# EAGLE board all (EAGLE 6.6.0), part 1 of 2
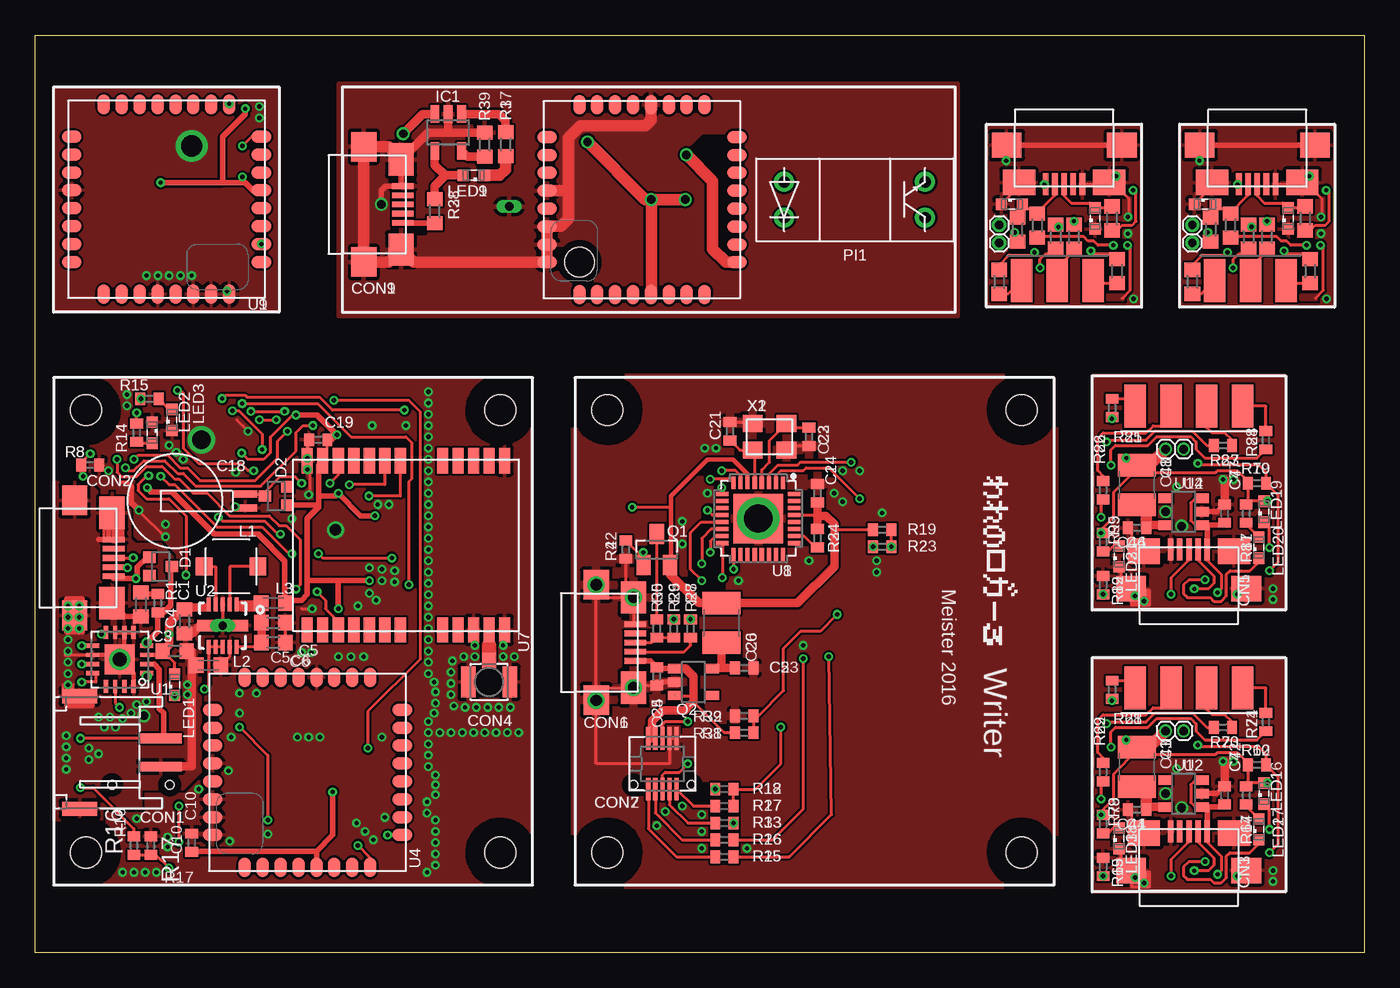
[diagram p0: board, top side]
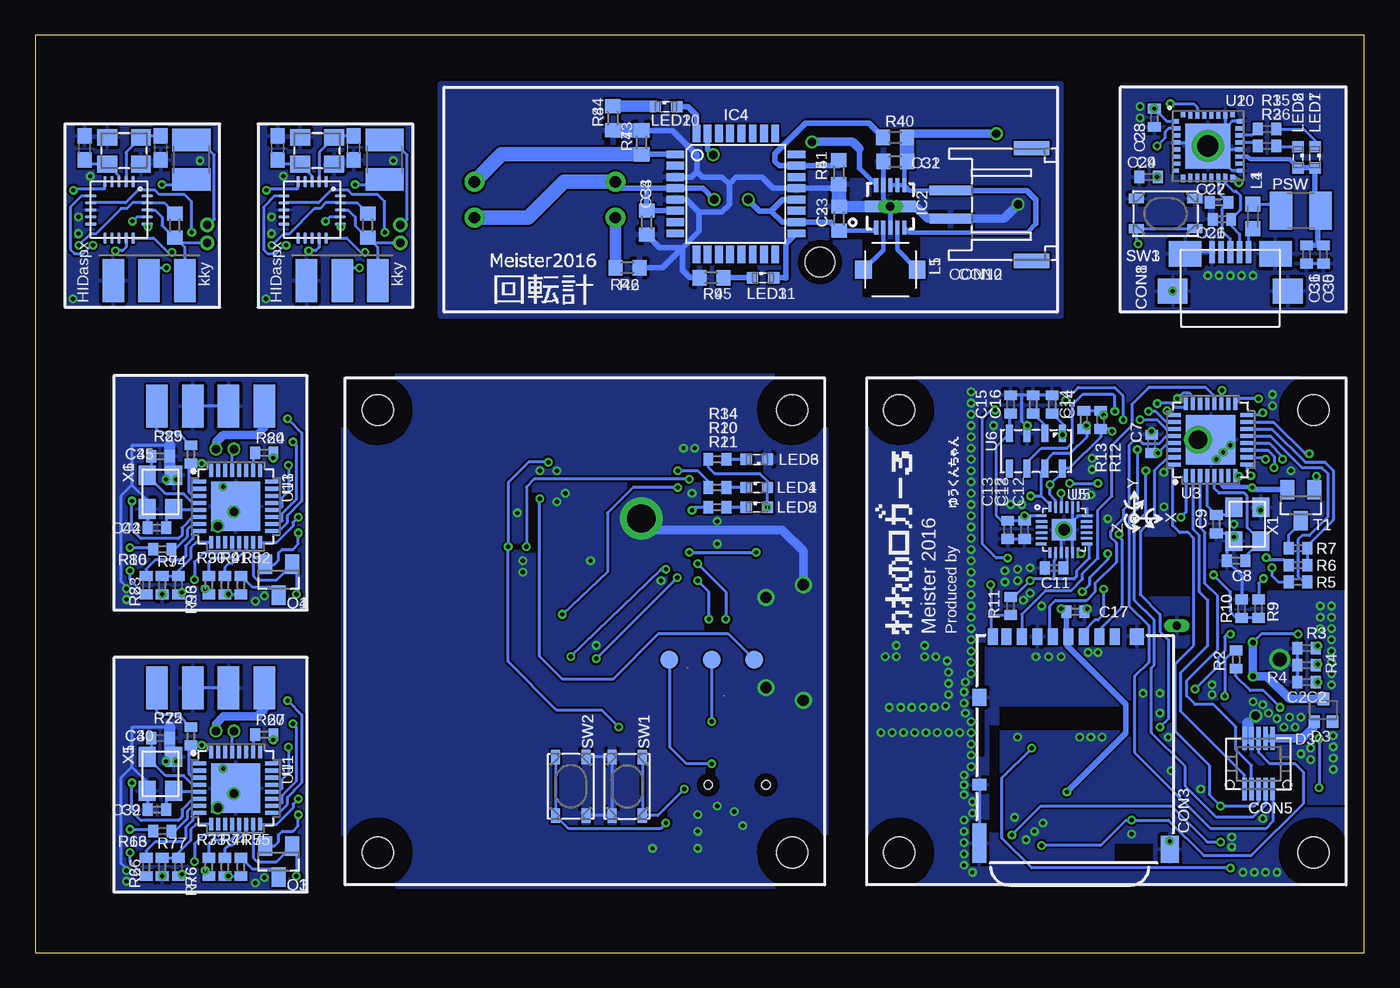
[diagram p1: board, bottom side, seen from below]

Size 94.3 x 65.1 mm. Coordinates in mm from the lower left corner, seen from the top.
Outline: 0,65.1 94.3,65.1 94.3,0 0,0 0,65.1
Copper layers (1*16): Top 0.035mm / dielectric 1.6mm / Bottom 0.035mm
Design rules "Elecrow_2-layer_PCB_eagle_rule": minimum track width 6mil, minimum drill 12mil, track to track 6mil, track to pad 6mil, pad to pad 6mil, via to via 8mil, smd to smd 0mil, copper to edge 20mil, drill to drill 10mil, minimum pad ring 6mil, minimum via ring 6mil, stop-mask expansion 0mil, vias tented up to drill 100mil, thermal gap 10mil
Holes 2.2 mm at 3.6,7.1 33,7.1 3.6,38.5 33,38.5 40.6,7.1 70,7.1 70,38.5 40.6,38.5
Holes 2.1 mm at 38.61,49.01
tRestrict: area 1.3,4.8 to 5.9,9.4; area 30.7,4.8 to 35.3,9.4; area 1.3,36.2 to 5.9,40.8; area 30.7,36.2 to 35.3,40.8; area 12.5,25.4 to 15.7,29.4; area 38.3,4.8 to 42.9,9.4; area 67.7,4.8 to 72.3,9.4; area 67.7,36.2 to 72.3,40.8; area 38.3,36.2 to 42.9,40.8; area 46.2,49 to 49.9,57.9; area 30.7,56.8 to 33.9,57.9; area 26.7,51.1 to 27.7,51.6; 1 more areas
bRestrict: area 1.3,4.8 to 5.9,9.4; area 30.7,4.8 to 35.3,9.4; area 12.5,25.4 to 15.7,29.4; area 1.3,36.2 to 5.9,40.8; area 30.7,36.2 to 35.3,40.8; area 38.3,4.8 to 42.9,9.4; area 67.7,4.8 to 72.3,9.4; area 67.7,36.2 to 72.3,40.8; area 38.3,36.2 to 42.9,40.8; area 31.7,46.7 to 35.5,50.5; area 43.2,48.3 to 45.1,48.9; area 34.6,55.7 to 40,58.6; 6 more areas

## Footprints (pad centres in the part's own frame; a part is rotated, then mirrored left to right if it is on the bottom)
0603 = smd 1 x 1.1: 1 -0.85,0; 2 0.85,0
0402 = smd 0.7 x 0.9: 1 -0.65,0; 2 0.65,0
DCK-3R3E224-E = smd 0.5 x 1.7: 1 -0.5,0; 2 0.5,0
C3225 = smd 1.6 x 2.7: 1 -1.4,0; 2 1.4,0
C0402 = smd 0.7 x 0.9: 1 -0.65,0; 2 0.65,0
C0603 = smd 1.1 x 1: 1 -0.85,0; 2 0.85,0
MICRO-B = smd 0.4 x 1.55: 1 1.3,2.775; 2 0.65,2.775; 3 0,2.775; 4 -0.65,2.775; 5 -1.3,2.775 | smd 2.3 x 1.8: CASE@1 -3.2,2.65; CASE@2 3.2,2.65 | smd 2.1 x 1.8: CASE@3 -4.1,0; CASE@4 4.075,0
2X4SMD = smd 1.524 x 3.048 bottom: 1 -3.81,0; 3 -1.27,0; 5 1.27,0; 7 3.81,0 | smd 1.524 x 3.048: 2 -3.81,0; 4 -1.27,0; 6 1.27,0; 8 3.81,0
JST-PH2 = smd 0.7 x 3: 1 1,-3.7; 2 -1,-3.7 | smd 1 x 2.5: PAD1 4,2.05; PAD2 -4,2.05
DM3AT-SF-PEJM5 = smd 0.7 x 1.2: 1 3.2,7.62; 2 2.1,7.62; 3 1,7.62; 4 -0.1,7.62; 5 -1.2,7.62; 6 -2.3,7.62; 7 -3.4,7.62; 8 -4.5,7.62; 9 -5.45,7.62 | smd 1 x 0.8: 10 -6.4,-2.88 | smd 1 x 1.2: P$10 4.75,7.62; P$12 -6.4,3.32 | smd 1.3 x 1.9: P$11 7.1,-7.48 | smd 1 x 2.8: P$14 -6.4,-7.03
U.FL-R-SMT-1 = smd 1.05 x 2.2: 1 -1.475,0; 2 1.475,0 | smd 1 x 1.05: 3 0,-1.525
DF12A-10DS = smd 0.3 x 1.6: 1 -1,-1.8; 2 -1,1.8; 3 -0.5,-1.8; 4 -0.5,1.8; 5 0,-1.8; 6 0,1.8; 7 0.5,-1.8; 8 0.5,1.8; 9 1,-1.8; 10 1,1.8 | hole 0.6: 2.05,1.5; -2.05,1.5
DF12D-10DP = smd 0.3 x 1.6 bottom: 1 -1,-1.8; 2 -1,1.8; 3 -0.5,-1.8; 4 -0.5,1.8; 5 0,-1.8; 6 0,1.8; 7 0.5,-1.8; 8 0.5,1.8; 9 1,-1.8; 10 1,1.8 | hole 0.6: 2.05,1.5; -2.05,1.5
UMD3 = smd 0.8 x 0.9: 1 0.65,-0.8; 2 -0.65,-0.8; 3 0,0.8
TSOT23-5 = smd 0.62 x 1.22: 1 -0.95,-1.31; 2 0,-1.31; 3 0.95,-1.31; 4 0.95,1.31; 5 -0.95,1.31
S-PVSON-N10 = smd 0.3 x 1: 1 -1,-1.5; 2 -0.5,-1.5; 3 0,-1.5; 4 0.5,-1.5; 5 1,-1.5; 6 1,1.5; 7 0.5,1.5; 8 0,1.5; 9 -0.5,1.5; 10 -1,1.5 | smd 3.6 x 0.8: PAD 0,0 | drill 0.6 long: PAD@1 0,0
LITE = smd 1.4 x 0.9: 1 0.25,11.43; 2 0.25,10.16; 3 0.25,8.89; 4 0.25,7.62; 5 0.25,6.35; 6 0.25,5.08; 7 0.25,3.81; 8 0.25,2.54; 17 13.72,2.54; 18 13.72,3.81; 19 13.72,5.08; 20 13.72,6.35; 21 13.72,7.62; 22 13.72,8.89; 23 13.72,10.16; 24 13.72,11.43 | smd 0.9 x 1.4: 9 2.54,0.25; 10 3.81,0.25; 11 5.08,0.25; 12 6.35,0.25; 13 7.62,0.25; 14 8.89,0.25; 15 10.16,0.25; 16 11.43,0.25; 25 11.43,13.72; 26 10.16,13.72; 27 8.89,13.72; 28 7.62,13.72; 29 6.35,13.72; 30 5.08,13.72; 31 3.81,13.72; 32 2.54,13.72
TQFP32-08 = smd 1.27 x 0.559: 1 -4.293,2.8; 2 -4.293,2; 3 -4.293,1.2; 4 -4.293,0.4; 5 -4.293,-0.4; 6 -4.293,-1.2; 7 -4.293,-2; 8 -4.293,-2.8; 17 4.293,-2.8; 18 4.293,-2; 19 4.293,-1.2; 20 4.293,-0.4; 21 4.293,0.4; 22 4.293,1.2; 23 4.293,2; 24 4.293,2.8 | smd 0.559 x 1.27: 9 -2.8,-4.293; 10 -2,-4.293; 11 -1.2,-4.293; 12 -0.4,-4.293; 13 0.4,-4.293; 14 1.2,-4.293; 15 2,-4.293; 16 2.8,-4.293; 25 2.8,4.293; 26 2,4.293; 27 1.2,4.293; 28 0.4,4.293; 29 -0.4,4.293; 30 -1.2,4.293; 31 -2,4.293; 32 -2.8,4.293
1X02/HALF = drill 0.6 pad 1.016: 1 -0.635,0; 2 0.635,0
1X02/HARF = drill 0.6: 1 0,-0.635; 2 0,0.635
VLF4012ST = smd 1.2 x 1.3: 1 1.9,0; 2 -1.9,0
C0603K = smd 1.05 x 1.08: 1 -0.875,0; 2 0.875,0
SML0603 = smd 0.8 x 0.8: A 0.75,0; C -0.75,0
RPI-574 = drill 0.8 pad 1.422: DA 0,0; DC 0,-2.54; TC 10,-2.54; TE 10,0
SOT23 = smd 1 x 1.4: 1 -0.95,-1.1; 2 0.95,-1.1; 3 0,1.1
SOT23_5PIN = smd 0.66 x 1: 1 0.95,1.3; 2 0,1.3; 3 -0.95,1.3; 4 -0.95,-1.3; 5 0.95,-1.3
R0402 = smd 0.7 x 0.9: 1 -0.65,0; 2 0.65,0
R0603 = smd 1 x 1.1: 1 -0.85,0; 2 0.85,0
SKRPACE010 = smd 1.05 x 0.65: 1 -2.075,1.075; 2 2.075,1.075; 3 -2.075,-1.075; 4 2.075,-1.075
QFN16 = smd 0.92 x 0.3: 1 -1.91,0.975; 2 -1.91,0.325; 3 -1.91,-0.325; 4 -1.91,-0.975; 9 1.91,-0.975; 10 1.91,-0.325; 11 1.91,0.325; 12 1.91,0.975 | smd 0.3 x 0.92: 5 -0.975,-1.91; 6 -0.325,-1.91; 7 0.325,-1.91; 8 0.975,-1.91; 13 0.975,1.91; 14 0.325,1.91; 15 -0.325,1.91; 16 -0.975,1.91 | smd 2.15 x 2.15: PAD 0,0
SOT617-3 = smd 0.9 x 0.29: 1 -2.55,1.75; 2 -2.55,1.25; 3 -2.55,0.75; 4 -2.55,0.25; 5 -2.55,-0.25; 6 -2.55,-0.75; 7 -2.55,-1.25; 8 -2.55,-1.75; 17 2.55,-1.75; 18 2.55,-1.25; 19 2.55,-0.75; 20 2.55,-0.25; 21 2.55,0.25; 22 2.55,0.75; 23 2.55,1.25; 24 2.55,1.75 | smd 0.29 x 0.9: 9 -1.75,-2.55; 10 -1.25,-2.55; 11 -0.75,-2.55; 12 -0.25,-2.55; 13 0.25,-2.55; 14 0.75,-2.55; 15 1.25,-2.55; 16 1.75,-2.55; 25 1.75,2.55; 26 1.25,2.55; 27 0.75,2.55; 28 0.25,2.55; 29 -0.25,2.55; 30 -0.75,2.55; 31 -1.25,2.55; 32 -1.75,2.55 | smd 3.5 x 3.5: 33 0,0
MPU-9250 = smd 0.74 x 0.2: 1 -1.63,1; 6 -1.63,-1; 13 1.63,-1; 18 1.63,1 | smd 0.8 x 0.2: 2 -1.6,0.6; 3 -1.6,0.2; 4 -1.6,-0.2; 5 -1.6,-0.6; 14 1.6,-0.6; 15 1.6,-0.2; 16 1.6,0.2; 17 1.6,0.6 | smd 0.2 x 0.74: 7 -1,-1.63; 12 1,-1.63; 19 1,1.63; 24 -1,1.63 | smd 0.2 x 0.8: 8 -0.6,-1.6; 9 -0.2,-1.6; 10 0.2,-1.6; 11 0.6,-1.6; 20 0.6,1.6; 21 0.2,1.6; 22 -0.2,1.6; 23 -0.6,1.6 | smd 1.7 x 1.54: PAD 0,0
MPL3115A2 = smd 1.27 x 0.5: 1 -1.25,1.875; 2 -1.25,0.625; 3 -1.25,-0.625; 4 -1.25,-1.875; 5 1.25,-1.875; 6 1.25,-0.625; 7 1.25,0.625; 8 1.25,1.875
NEO-7M = smd 1.8 x 0.8: 1 12.1,1; 2 12.1,2.1; 3 12.1,3.2; 4 12.1,4.3; 5 12.1,5.4; 6 12.1,6.5; 7 12.1,7.6; 8 12.1,10.6; 9 12.1,11.7; 10 12.1,12.8; 11 12.1,13.9; 12 12.1,15; 13 0.1,15; 14 0.1,13.9; 15 0.1,12.8; 16 0.1,11.7; 17 0.1,10.6; 18 0.1,7.6; 19 0.1,6.5; 20 0.1,5.4; 21 0.1,4.3; 22 0.1,3.2; 23 0.1,2.1; 24 0.1,1
QFN32 = smd 0.5 x 0.3: 1 -2.3,1.75; 8 -2.3,-1.75; 17 2.3,-1.75; 24 2.3,1.75 | smd 0.6 x 0.3: 2 -2.25,1.25; 3 -2.25,0.75; 4 -2.25,0.25; 5 -2.25,-0.25; 6 -2.25,-0.75; 7 -2.25,-1.25; 18 2.25,-1.25; 19 2.25,-0.75; 20 2.25,-0.25; 21 2.25,0.25; 22 2.25,0.75; 23 2.25,1.25 | smd 0.3 x 0.5: 9 -1.75,-2.3; 16 1.75,-2.3; 25 1.75,2.3; 32 -1.75,2.3 | smd 0.3 x 0.6: 10 -1.25,-2.25; 11 -0.75,-2.25; 12 -0.25,-2.25; 13 0.25,-2.25; 14 0.75,-2.25; 15 1.25,-2.25; 26 1.25,2.25; 27 0.75,2.25; 28 0.25,2.25; 29 -0.25,2.25; 30 -0.75,2.25; 31 -1.25,2.25 | smd 3.2 x 3.2: PAD 0,0
TESTPAD = smd 1.27 x 1.27: P$1 0,0
MLF20 = smd 0.8 x 0.23: P$1 -2,1; P$2 -2,0.5; P$3 -2,0; P$4 -2,-0.5; P$5 -2,-1; P$11 2,-1; P$12 2,-0.5; P$13 2,0; P$14 2,0.5; P$15 2,1 | smd 0.23 x 0.8: P$6 -1,-2; P$7 -0.5,-2; P$8 0,-2; P$9 0.5,-2; P$10 1,-2; P$16 1,2; P$17 0.5,2; P$18 0,2; P$19 -0.5,2; P$20 -1,2
6PAD_ISP = smd 1.524 x 3.048 bottom: GND 2.54,0; MOSI 0,0; VCC -2.54,0 | smd 1.524 x 3.048: MISO -2.54,0; RST 2.54,0; SCK 0,0
V66RA = smd 1.4 x 1.2: P1X1 -1.2,-0.95; P2GND 1.2,-0.95; P3X2 1.2,0.95; P4GND -1.2,0.95

## Placement (x,y rotation side)
C1  10u  [0603]  7.5,24.7 270 top
C2  0.2u  [0402]  4.1,19.2 180 bottom
C3  10u  [0603]  9.9,21.4 0 top
C4  10u  [0603]  10.6,23.5 270 top
C5  10u  [0603]  16.9,23.4 0 top
C6  10u  [0603]  16.9,22 0 top
C7  0.1u  [0402]  15.1,36.1 90 bottom
C8  [0402]  9.1,27.8 180 bottom
C9  [0402]  10.5,30.4 270 bottom
C10  0.1u  [0402]  11.1,7.8 90 top
C11  0.1u  [0402]  22,27.3 180 bottom
C12  0.1u  [0402]  24.1,30 270 bottom
C13  10n  [0402]  25.3,30 270 bottom
C14  0.1u  [0402]  22.15,38.9 90 bottom
C15  10u  [0402]  25.1,38.9 90 bottom
C16  0.1u  [0402]  23.5,38.9 90 bottom
C17  0.1u  [0402]  20.5,24.2 0 bottom
C18  DCK-3R3E224-E  [DCK-3R3E224-E]  14.9,32.05 90 top
C19  0.1u  [0402]  20.07,36.4 180 top
C20  PSW  [C3225]  48.7,23.4 270 top
C21  8P  [C0402]  49.3,37 90 top
C22  8P  [C0402]  54.9,36.6 270 top
C23  1u  [C0402]  50.3,20.2 0 top
C24  0.1u  [C0402]  55.5,32.6 90 top
C25  1u  [C0402]  44.1,19.6 270 top
C26  [0402]  10.1,52.04 180 bottom
C27  [0402]  10.3,53.24 180 bottom
C28  [0402]  14.9,59.24 270 bottom
C29  [0402]  15.3,55.04 180 bottom
C30  [0402]  2.9,49.54 270 bottom
C31  [0402]  4.1,49.54 270 bottom
C32  10u  [0603]  33.28,56.13 180 bottom
C33  10u  [0603]  37.26,52.09 90 bottom
C34  0.1u  [0603]  50.92,51.8 270 bottom
C35  22p  [C0603]  90.8,57.1 90 bottom
C36  22p  [C0603]  85.4,57.1 270 bottom
C37  22p  [C0603]  77.1,57.1 90 bottom
C38  22p  [C0603]  71.7,57.1 270 bottom
C39  8P  [C0402]  85.67,10.14 180 bottom
C40  8P  [C0402]  85.41,15.22 0 bottom
C41  1u  [C0402]  78.17,10.14 180 top
C42  1u  [C0402]  84.4,11.16 90 top
C43  PSW  [C3225]  78.17,13.19 270 top
C44  8P  [C0402]  85.67,30.14 180 bottom
C45  8P  [C0402]  85.41,35.22 0 bottom
C46  1u  [C0402]  78.17,30.14 180 top
C47  1u  [C0402]  84.4,31.16 90 top
C48  PSW  [C3225]  78.17,33.19 270 top
CN1  ZX62R-B-5P  [MICRO-B]  86.7,57.3 180 top
CN2  ZX62R-B-5P  [MICRO-B]  73,57.3 180 top
CN3  ZX62R-B-5P  [MICRO-B]  81.86,5.82 0 top
CN4  [2X4SMD]  81.86,18.78 0 top
CN5  ZX62R-B-5P  [MICRO-B]  81.86,25.82 0 top
CN6  [2X4SMD]  81.86,38.78 0 top
CON1  [JST-PH2]  5.2,14.2 90 top
CON2  ZX62R-B-5P  [MICRO-B]  2.8,28 270 top
CON3  DM3AT-SF-PEJM5SMD  [DM3AT-SF-PEJM5]  20.9,14.8 0 bottom
CON4  U.FL  [U.FL-R-SMT-1]  32.2,19.2 180 top
CON5  DF12#-10DS  [DF12A-10DS]  7.5,13.4 180 bottom
CON6  ZX62R-B-5P  [MICRO-B]  39.8,22 270 top
CON7  DF12#-10DP  [DF12D-10DP]  44.5,13.4 180 bottom
CON8  ZX62R-B-5P  [MICRO-B]  9.5,46.94 0 bottom
CON9  ZX62R-B-5P  [MICRO-B]  23.31,53.09 270 top
CON10  [JST-PH2]  25.65,53.09 270 bottom
D1  RB461F  [UMD3]  8.9,27.4 270 top
D2  RB461F  [UMD3]  17.1,32.4 90 top
D3  RB461F  [UMD3]  2.9,17.2 0 bottom
IC1  [TSOT23-5]  29.3,58.2 180 top
IC2  [S-PVSON-N10]  33.63,52.95 0 bottom
IC3  LITESMD  [LITE]  50.04,46.45 90 top
IC4  ATMEGA48/88/168-AU  [TQFP32-08]  44.59,53.84 0 bottom
JP1  [1X02/HALF]  82.1,51 90 top
JP2  [1X02/HALF]  68.4,51 90 top
JP3  [1X02/HARF]  80.84,15.73 90 top
JP4  [1X02/HARF]  80.84,35.73 90 top
L1  2.2u  [VLF4012ST]  13.9,27.4 180 top
L2  BLM  [C0603K]  12.3,20.4 0 top
L3  BLM  [C0603K]  16.9,24.8 180 top
L4  [C0603K]  7.9,52.24 270 bottom
L5  2.2u  [VLF4012ST]  33.62,48.47 0 bottom
LED1  [SML0603]  9.9,19 90 top
LED2  [SML0603]  8.3,36.9 270 top
LED3  [SML0603]  9.7,37.8 90 top
LED4  [SML0603]  43.1,33 0 bottom
LED5  [SML0603]  43.1,31.6 0 bottom
LED6  [SML0603]  43.1,35 180 bottom
LED7  [SML0603]  3.5,56.44 270 bottom
LED8  [SML0603]  4.7,56.44 270 bottom
LED9  [SML0603]  31.11,55.16 180 top
LED10  [SML0603]  49.54,60.03 0 bottom
LED11  [SML0603]  42.66,47.89 0 bottom
LED12  BLUE  [SML0603]  88.9,52.1 90 top
LED13  BLUE  [SML0603]  83,53.1 0 top
LED14  BLUE  [SML0603]  75.2,52.1 90 top
LED15  BLUE  [SML0603]  69.3,53.1 0 top
LED16  [SML0603]  87.19,11.29 90 top
LED17  [SML0603]  86.81,8.74 90 top
LED18  [SML0603]  76.91,8.11 90 top
LED19  [SML0603]  87.19,31.29 90 top
LED20  [SML0603]  86.81,28.75 90 top
LED21  [SML0603]  76.91,28.11 90 top
PI1  RPI-574  [RPI-574]  53.14,54.7 0 top
PSW  100m  [C3225]  4.5,52.64 180 bottom
PSW1  100m  [C3225]  83.22,56.26 270 bottom
PSW2  100m  [C3225]  69.52,56.26 270 bottom
Q1  PDTA114ET  [SOT23]  44.1,28.6 0 top
Q2  MIC550X  [SOT23_5PIN]  46.7,19.2 90 top
Q3  PDTA114ET  [SOT23]  77.03,6.46 180 bottom
Q4  PDTA114ET  [SOT23]  77.03,26.46 180 bottom
R1  1  [0402]  8.7,24.8 270 top
R2  100  [0402]  9.1,20.8 90 bottom
R3  105k  [0402]  4.1,21.6 0 bottom
R4  124k  [0402]  4.1,20.4 0 bottom
R5  33  [0402]  4.7,26.3 0 bottom
R6  33  [0402]  4.7,27.5 0 bottom
R7  1.5k  [0402]  4.7,28.7 180 bottom
R8  10k  [0402]  3.9,34.6 180 top
R9  5.6k  [0402]  7.5,24.4 90 bottom
R10  10k  [0402]  8.7,24.4 270 bottom
R11  4.7k  [0402]  25.1,24.6 90 bottom
R12  4.7k  [0402]  18.7,37.8 90 bottom
R13  4.7k  [0402]  19.9,37.8 90 bottom
R14  100  [0402]  7.2,36.9 90 top
R15  100  [0402]  8.1,39.3 180 top
R16  3.3k  [0402]  7,7.6 90 top
R17  2.2k  [0402]  8.2,7.6 270 top
R18  270  [R0402]  48.9,11.6 0 top
R19  10k  [R0402]  60.1,30 0 top
R20  1.5k  [R0402]  45.9,33 180 bottom
R21  1.5k  [R0402]  45.9,31.6 180 bottom
R22  10k  [R0402]  41.9,28.6 90 top
R23  270  [R0402]  60.1,28.8 180 top
R24  10k  [R0402]  55.5,29.4 90 top
R25  270  [R0402]  48.9,6.8 0 top
R26  270  [R0402]  48.9,8 0 top
R27  270  [R0402]  48.9,10.4 0 top
R28  33  [R0402]  46.5,23 270 top
R29  33  [R0402]  45.3,23 270 top
R30  1.5k  [R0402]  44.1,23 90 top
R31  5.6k  [R0402]  50.3,15.6 180 top
R32  10k  [R0402]  50.3,16.8 0 top
R33  270  [R0402]  48.9,9.2 180 top
R34  750  [R0402]  45.9,35 0 bottom
R35  [R0402]  6.9,58.44 0 bottom
R36  [R0402]  6.9,57.24 0 bottom
R37  100  [0603]  33.38,57.36 90 top
R38  0.25  [0603]  28.34,52.62 90 top
R39  3.2k  [0603]  31.89,57.34 270 top
R40  3.3k  [0603]  33.29,57.85 0 bottom
R41  2.2k  [0603]  37.28,55.37 90 bottom
R42  200  [0603]  52.28,48.6 180 bottom
R43  1.0M  [0603]  51.27,57.49 90 bottom
R44  200  [0603]  53.32,59.22 90 bottom
R45  200  [0603]  46.33,47.89 0 bottom
R46  2.2k  [R0603]  83.4,51.3 90 top
R47  75  [R0603]  84.8,51.6 90 top
R48  75  [R0603]  90.1,52.1 90 top
R49  10k  [R0603]  84.4,51.6 90 bottom
R50  100  [R0603]  86.1,50.8 90 top
R51  100  [R0603]  82.1,47.6 270 top
R52  100  [R0603]  87.4,50.8 270 top
R53  100  [R0603]  90.46,48.37 270 top
R54  2.2k  [R0603]  69.7,51.3 90 top
R55  75  [R0603]  71.1,51.6 90 top
R56  75  [R0603]  76.4,52.1 90 top
R57  10k  [R0603]  70.7,51.6 90 bottom
R58  100  [R0603]  72.4,50.8 90 top
R59  100  [R0603]  68.4,47.6 270 top
R60  100  [R0603]  73.7,50.8 270 top
R61  100  [R0603]  76.76,48.37 270 top
R62  10k  [R0402]  86.68,13.32 0 top
R63  1.5k  [R0402]  85.29,8.62 0 bottom
R64  1.5k  [R0402]  85.92,11.16 270 top
R65  10k  [R0402]  75.76,6.08 270 top
R66  270  [R0402]  86.43,6.08 90 bottom
R67  10k  [R0402]  78.05,15.48 0 bottom
R68  270  [R0402]  76.4,18.65 270 top
R69  270  [R0402]  75.76,12.81 270 top
R70  270  [R0402]  84.27,15.98 180 top
R71  270  [R0402]  87.32,16.36 270 top
R72  270  [R0402]  83.25,15.35 270 bottom
R73  33  [R0402]  81.98,6.08 270 bottom
R74  33  [R0402]  80.84,6.08 270 bottom
R75  1.5k  [R0402]  79.7,6.08 90 bottom
R76  5.6k  [R0402]  84.14,6.08 270 bottom
R77  10k  [R0402]  85.29,6.08 90 bottom
R78  750  [R0402]  75.76,9.13 270 top
R79  10k  [R0402]  86.68,33.32 0 top
R80  1.5k  [R0402]  85.29,28.62 0 bottom
R81  1.5k  [R0402]  85.92,31.16 270 top
R82  10k  [R0402]  75.76,26.08 270 top
R83  270  [R0402]  86.43,26.08 90 bottom
R84  10k  [R0402]  78.05,35.48 0 bottom
R85  270  [R0402]  76.4,38.65 270 top
R86  270  [R0402]  75.76,32.81 270 top
R87  270  [R0402]  84.27,35.98 180 top
R88  270  [R0402]  87.32,36.37 270 top
R89  270  [R0402]  83.25,35.35 270 bottom
R90  33  [R0402]  81.98,26.08 270 bottom
R91  33  [R0402]  80.84,26.08 270 bottom
R92  1.5k  [R0402]  79.7,26.08 90 bottom
R93  5.6k  [R0402]  84.14,26.08 270 bottom
R94  10k  [R0402]  85.29,26.08 90 bottom
R95  750  [R0402]  75.76,29.13 270 top
SW1  SKRPACE010  [SKRPACE010]  52.3,11.8 90 bottom
SW2  SKRPACE010  [SKRPACE010]  56.3,11.8 270 bottom
SW3  SKRPACE010  [SKRPACE010]  14.1,52.44 0 bottom
T1  PDTA114ET  [SOT23]  4.5,31.75 180 bottom
U1  LTC4055  [QFN16]  6,20.8 180 top
U2  TPS6300XDRCT  [S-PVSON-N10]  13.3,23.2 180 top
U3  LPC11U35FHI33/501  [SOT617-3]  10.9,36.4 90 bottom
U4  TWE-LITE_SMD  [LITE]  26.3,5.8 90 top
U5  MPU-9250  [MPU-9250]  21.3,30 0 bottom
U6  MPL3115A2  [MPL3115A2]  23.3,35.6 270 bottom
U7  NEO-7M  [NEO-7M]  18.3,35 270 top
U8  LPC11U35FHI33/501  [SOT617-3]  51.3,30.8 270 top
U9  TWE-LITE_SMD  [LITE]  16.3,60.44 180 top
U10  FT232RQ  [QFN32]  11.1,57.24 0 bottom
U11  LPC11U35FHI33/501  [SOT617-3]  80.08,11.67 0 bottom
U12  MIC550X  [SOT23_5PIN]  81.48,11.29 270 top
U13  LPC11U35FHI33/501  [SOT617-3]  80.08,31.67 0 bottom
U14  MIC550X  [SOT23_5PIN]  81.48,31.29 270 top
U$1  [DIRECTION]  16.3,30.8 90 bottom
U$2  TESTPAD  [TESTPAD]  49.3,20.8 0 bottom
U$3  TESTPAD  [TESTPAD]  46.3,20.8 0 bottom
U$4  TESTPAD  [TESTPAD]  43.3,20.8 0 bottom
U$5  TINY2313-*M*  [MLF20]  88.35,52.7 270 bottom
U$6  AVR-ISP-6-EDGE  [6PAD_ISP]  86.22,47.69 0 top
U$7  TINY2313-*M*  [MLF20]  74.65,52.7 270 bottom
U$8  AVR-ISP-6-EDGE  [6PAD_ISP]  72.52,47.69 0 top
X1  FA238V  [V66RA]  8.3,30.4 90 bottom
X2  FA238V  [V66RA]  52.1,36.6 0 top
X3  FA238V  [V66RA]  88,56.9 180 bottom
X4  FA238V  [V66RA]  74.3,56.9 180 bottom
X5  FA238V  [V66RA]  85.41,12.68 90 bottom
X6  FA238V  [V66RA]  85.41,32.68 90 bottom

## Library data of the parts
C1-C19 C26-C34 CON1-CON5 CON7-CON9 D1-D3 IC1-IC3 L1 L5 Q2 R1-R17 R37-R45 SW1-SW3 T1 U1 U2 U4-U7 U9 U10 U12 U14 U$1-U$4 X1 = untitled
C20-C25 C35-C48 L2-L4 PSW PSW1 PSW2 R18-R36 R46-R95 = rcl
CN1-CN3 CN5 CON6 = con-USB
CN4 CN6 JP1-JP4 = pinhead'
CON10 = rpmmeter_parts
IC4 = atmega8
LED1-LED21 = led
PI1 = RPI-574
Q1 Q3 Q4 = nxp_60_1_1
U3 = untitled; FLASH: 64kB; GPIO: 26; SRAM: 12kB
U8 U11 U13 = nxp_60_1_1; FLASH: 64kB; GPIO: 26; SRAM: 12kB
U$5-U$8 = avr-7
X2 X5 X6 = 201508-noshiro
X3 X4 = crystal_epson

## Nets
!RESET!: CON5.10 U3.2
!USB_CONNECT!: R8.2 T1.1 U3.15
!USB_CONNECT!1: Q1.1 R22.2 U8.15
!USB_CONNECT!2: Q3.1 R65.2 U11.15
!USB_CONNECT!3: Q4.1 R82.2 U13.15
+3V1: C28.1 C29.1 U9.5 U10.1 U10.16
+3V2: C33.1 C34.1 IC2.1 IC2.10 IC3.5 IC4.4 IC4.6 IC4.18 IC4.20 PI1.DA PI1.TC
+3V3: C7.1 C10.1 C12.1 C13.1 C14.1 C15.1 C17.1 C19.1 CON3.4 D2.2 L3.1 R11.2 R12.2 R13.2 T1.2 U3.6 U3.29 U4.5 U5.1 U5.8 U5.13 U5.22 U6.1 U6.4 U7.23
+5V: D1.3 D3.3 R1.2 U1.1 U1.4 U1.8
+5V1: C30.1 C31.1 LED7.A LED8.A PSW.1 U10.19
AD7: R16.1 R17.2 U3.27
BOOT: CON7.8 R33.2
D+USB: CON6.3 R29.2 R30.1
D+USB1: CN3.3 R74.2 R75.1
D+USB2: CN5.3 R91.2 R92.1
D-USB: CON6.2 R28.2
D-USB1: CN3.2 R73.2
D-USB2: CN5.2 R90.2
GND: C5.2 C6.2 C7.2 C8.2 C9.2 C10.2 C11.2 C12.2 C13.2 C14.2 C15.2 C16.2 C17.2 C18.1 C19.2 CON3.6 CON3.10 CON3.P$10 CON3.P$11 CON3.P$12 CON3.P$14 CON4.1 CON4.2 L2.2 LED2.C LED3.C R8.1 R10.1 R17.1 U2.9 U3.33 U4.20 U4.28 U4.30 U4.31 U4.32 U5.9 U5.11 U5.18 U5.20 U5.PAD U6.3 U7.10 U7.12 U7.13 U7.24 X1.P2GND X1.P4GND
GND1: C21.2 C22.2 C23.2 C24.2 C25.2 CON6.5 CON6.CASE@1 CON6.CASE@2 CON6.CASE@3 CON6.CASE@4 CON7.7 CON7.9 LED6.C Q2.2 R22.1 R32.1 SW1.1 SW1.2 SW2.1 SW2.2 U8.33 X2.P2GND X2.P4GND
GND2: C26.2 C27.2 C28.2 C29.2 C30.2 C31.2 CON8.5 CON8.CASE@1 CON8.CASE@2 CON8.CASE@3 CON8.CASE@4 SW3.1 SW3.2 U9.20 U9.28 U9.30 U9.31 U9.32 U10.4 U10.17 U10.20 U10.24 U10.26 U10.PAD
GND3: C32.2 C33.2 C34.2 CON9.5 CON9.CASE@1 CON9.CASE@2 CON9.CASE@3 CON9.CASE@4 CON10.1 IC1.2 IC2.3 IC2.9 IC2.PAD IC2.PAD@1 IC3.20 IC3.28 IC3.30 IC3.31 IC3.32 IC4.3 IC4.5 IC4.21 R39.1 R41.1 R42.1 R43.2 R44.1 R45.1
GND4: C35.2 C36.2 CN1.5 CN1.CASE@1 CN1.CASE@2 CN1.CASE@3 CN1.CASE@4 LED12.C LED13.C U$5.P$8 U$6.GND X3.P2GND X3.P4GND
GND5: C37.2 C38.2 CN2.5 CN2.CASE@1 CN2.CASE@2 CN2.CASE@3 CN2.CASE@4 LED14.C LED15.C U$7.P$8 U$8.GND X4.P2GND X4.P4GND
GND6: C39.2 C40.2 C41.2 C42.2 CN3.5 CN3.CASE@1 CN3.CASE@2 CN3.CASE@3 CN3.CASE@4 CN4.3 CN4.5 LED18.C R65.1 R77.1 U11.33 U12.2 X5.P2GND X5.P4GND
GND7: C44.2 C45.2 C46.2 C47.2 CN5.5 CN5.CASE@1 CN5.CASE@2 CN5.CASE@3 CN5.CASE@4 CN6.3 CN6.5 LED21.C R82.1 R94.1 U13.33 U14.2 X6.P2GND X6.P4GND
MISO1: CON3.7 U3.20
MISO2: R59.1 U$7.P$15
MISO3: R51.1 U$5.P$15
MOSI1: CON3.3 U3.12
MOSI2: R58.2 U$7.P$16
MOSI3: R50.2 U$5.P$16
N$1: C8.1 U3.5 X1.P1X1
N$2: CON2.2 R5.1
N$3: C9.1 U3.4 X1.P3X2
N$4: CON2.3 R6.1
N$5: R7.2 T1.3
N$6: LED3.A R15.1
N$7: CON4.3 U7.11
N$8: C16.1 U6.2
N$9: L1.2 U2.2
N$10: C11.1 U5.10
N$11: L1.1 U2.4
N$12: LED2.A R14.1
N$13: C21.1 U8.5 X2.P1X1
N$14: C22.1 U8.4 X2.P3X2
N$15: R29.1 U8.14
N$16: C1.1 R1.1
N$17: C5.1 C6.1 L3.2 U2.1 U2.10
N$18: CON5.1 CON5.3 D3.2
N$19: R3.2 U1.9
N$20: R4.2 U1.11
N$21: C2.1 U1.12
N$22: R2.1 U1.14
N$23: LED1.C R2.2
N$24: C3.1 C4.1 LED1.A U1.3 U2.5 U2.6 U2.7 U2.8
N$25: CON1.1 R16.2 U1.2
N$26: C18.2 D2.3 U7.22
N$27: R28.1 U8.13
N$28: Q1.3 R30.2
N$29: CON7.2 R25.1
N$30: CON7.4 R26.1
N$31: LED6.A R34.2
N$32: LED4.C R20.1
N$33: C20.2 C23.1 Q2.5
N$34: CON7.10 R27.1
N$35: R18.1 SW1.3 SW1.4
N$36: R33.1 SW2.3 SW2.4
N$37: U8.2 U$4.P$1
N$38: LED5.C R21.1
N$39: C26.1 CON8.2 U10.15
N$40: C27.1 CON8.3 U10.14
N$41: CON8.1 L4.2
N$42: U9.9 U10.30
N$43: U9.8 U10.2
N$44: L4.1 PSW.2
N$45: LED7.C R35.2
N$46: LED8.C R36.2
N$47: R35.1 U10.22
N$48: R36.1 U10.21
N$49: SW3.3 SW3.4 U9.2
N$50: IC1.4 LED9.A R38.2
N$51: IC1.1 R37.2
N$52: LED9.C R37.1
N$53: IC2.4 L5.1
N$54: IC2.2 L5.2
N$55: CON9.1 R38.1
N$56: IC1.5 R39.2
N$57: IC4.23 R40.1 R41.2
N$58: IC4.1 PI1.TE R43.1
N$59: PI1.DC R42.2
N$60: IC4.17 LED11.A
N$61: LED11.C R45.2
N$62: IC4.32 LED10.A
N$63: LED10.C R44.2
N$64: C36.1 U$5.P$2 X3.P1X1
N$65: C35.1 U$5.P$3 X3.P3X2
N$66: CN1.1 PSW1.2
N$67: CN1.2 LED13.A R46.2 R47.2
N$68: CN1.3 LED12.A R48.2
N$69: R46.1 U$5.P$7
N$70: R47.1 U$5.P$6
N$71: R48.1 U$5.P$5
N$72: R49.2 U$5.P$19
N$73: R52.2 U$6.SCK
N$74: R51.2 U$6.MISO
N$75: R53.2 U$6.RST
N$76: R50.1 U$6.MOSI
N$77: JP1.2 PSW1.1
N$78: C38.1 U$7.P$2 X4.P1X1
N$79: C37.1 U$7.P$3 X4.P3X2
N$80: CN2.1 PSW2.2
N$81: CN2.2 LED15.A R54.2 R55.2
N$82: CN2.3 LED14.A R56.2
N$83: R54.1 U$7.P$7
N$84: R55.1 U$7.P$6
N$85: R56.1 U$7.P$5
N$86: R57.2 U$7.P$19
N$87: R60.2 U$8.SCK
N$88: R59.2 U$8.MISO
N$89: R61.2 U$8.RST
N$90: R58.1 U$8.MOSI
N$91: JP2.2 PSW2.1
N$92: C39.1 U11.5 X5.P1X1
N$93: C40.1 U11.4 X5.P3X2
N$94: R74.1 U11.14
N$95: R73.1 U11.13
N$96: Q3.3 R75.2
N$97: CN4.2 R68.1
N$98: CN4.4 R69.1
N$99: CN4.6 R70.1
N$100: CN4.8 R71.1
N$101: LED18.A R78.2
N$102: LED17.A R64.2
N$103: LED16.C R63.1
N$104: C41.1 C43.2 U12.5
N$105: CN4.7 R72.1
N$106: CN4.1 JP3.1
N$107: C44.1 U13.5 X6.P1X1
N$108: C45.1 U13.4 X6.P3X2
N$109: R91.1 U13.14
N$110: R90.1 U13.13
N$111: Q4.3 R92.2
N$112: CN6.2 R85.1
N$113: CN6.4 R86.1
N$114: CN6.6 R87.1
N$115: CN6.8 R88.1
N$116: LED21.A R95.2
N$117: LED20.A R81.2
N$118: LED19.C R80.1
N$119: C46.1 C48.2 U14.5
N$120: CN6.7 R89.1
N$121: CN6.1 JP4.1
PGND: C1.2 C2.2 C3.2 C4.2 CON1.2 CON1.PAD1 CON1.PAD2 CON2.5 CON2.CASE@1 CON2.CASE@2 CON2.CASE@3 CON2.CASE@4 CON5.7 CON5.9 L2.1 R3.1 R4.1 U1.5 U1.6 U1.7 U1.10 U1.16 U1.PAD U2.3 U2.PAD U2.PAD@1
PIO0_1: CON5.8 U3.3
PIO0_2: U3.8 U7.3
PIO0_3: R23.2 U8.8
PIO0_4: R24.1 U8.26
PIO0_5: R66.2 U11.8
PIO0_6: LED17.C U11.12
PIO0_7: R14.2 U3.16
PIO0_8: R15.2 U3.17
PIO0_9: R67.1 U11.26
PIO0_10: R63.2 U11.7
PIO0_11: R83.2 U13.8
PIO0_12: LED20.C U13.12
PIO0_13: U3.23 U5.12
PIO0_14: CON3.9 R11.1 U3.24
PIO0_15: R84.1 U13.26
PIO0_16: U3.26 U6.6
PIO0_17: R80.2 U13.7
PIO0_20: R20.2 U8.7
PIO0_21: R21.2 U8.12
PIO1_19: CON3.2 U3.1
RST1: R61.1 U$7.P$14
RST2: R53.1 U$5.P$14
RXD: CON5.5 U3.31 U4.8
RXD1: CON7.5 U$3.P$1
SCK1: CON3.5 U3.28
SCK2: R60.1 U$7.P$17
SCK3: R52.1 U$5.P$17
SCL: R12.1 U3.10 U5.23 U6.8 U7.19
SDA: R13.1 U3.11 U5.24 U6.7 U7.18
SWCLK: CON5.4 U3.19
SWDIO: CON5.2 U3.25
TARGET_!RESET!: R18.2 R19.2 R23.1 R27.2 U8.3
TARGET_!RESET!1: R62.2 R66.1 R72.2 U11.3
TARGET_!RESET!2: R79.2 R83.1 R89.2 U13.3
TARGET_SWCLK: R26.2 U8.16
TARGET_SWCLK1: R69.2 U11.16
TARGET_SWCLK2: R86.2 U13.16
TARGET_SWDIO: R25.2 U8.17
TARGET_SWDIO1: R68.2 U11.17
TARGET_SWDIO2: R85.2 U13.17
TARGET_SWO: R70.2 U11.18
TARGET_SWO1: R87.2 U13.18
TARGET_TDI: R71.2 U11.20
TARGET_TDI1: R88.2 U13.20
TXD: CON5.6 U3.32 U4.9
TXD1: CON7.6 U$2.P$1
U3: IC3.9 IC4.31
USB_D+: R6.2 R7.1 U3.14
USB_D-: R5.2 U3.13
USB_VBUS: R9.1 R10.2 U3.9
USB_VBUS1: R31.1 R32.2 U8.9
USB_VBUS2: R76.1 R77.2 U11.9
USB_VBUS3: R93.1 R94.2 U13.9
VBUS: CON2.1 D1.2 R9.2
VCC: C25.1 CON6.1 CON7.1 CON7.3 Q2.1 Q2.3 R31.2
VCC1: C32.1 CON10.2 IC1.3 IC2.5 IC2.6 IC2.7 IC2.8 R40.2
VCC2: JP1.1 R49.1 U$5.P$18 U$6.VCC
VCC3: JP2.1 R57.1 U$7.P$18 U$8.VCC
VCC4: C42.1 CN3.1 R76.2 U12.1 U12.3
VCC5: C47.1 CN5.1 R93.2 U14.1 U14.3
VDD: C20.1 C24.1 LED4.A LED5.A Q1.2 R19.1 R24.2 R34.1 U8.6 U8.29
VDD1: C43.1 JP3.2 LED16.A Q3.2 R62.1 R64.1 R67.2 R78.1 U11.6 U11.29
VDD2: C48.1 JP4.2 LED19.A Q4.2 R79.1 R81.1 R84.2 R95.1 U13.6 U13.29
VDD_USB: U7.7
VNTC: U1.15